# Altium PCB QSTL_M12C_BNC_v2.PcbDoc
Units mm, origin at the board's own origin, x right, y up, seen from the top; angles counter-clockwise.
Board outline 130 x 70 mm, 4 copper layers (Top Layer, Layer 1, Layer 2, Bottom Layer), stack 0.603 mm thick; 25 components, 25 nets, 132 pads, 2468 vias.
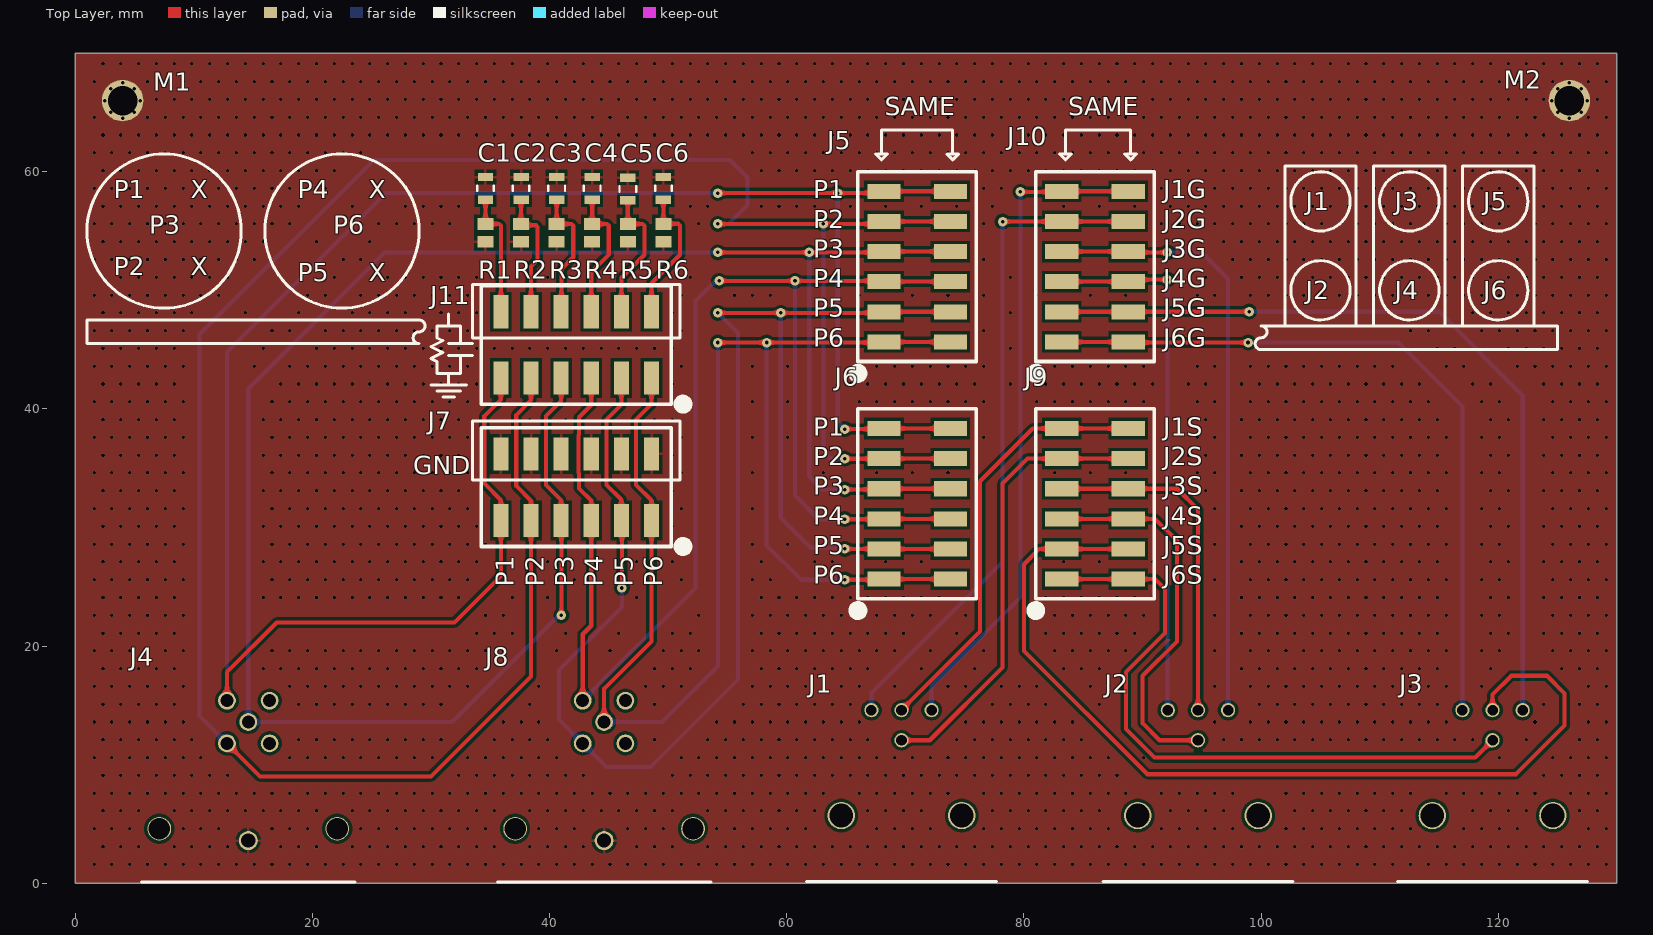
[diagram p0: Top Layer view]
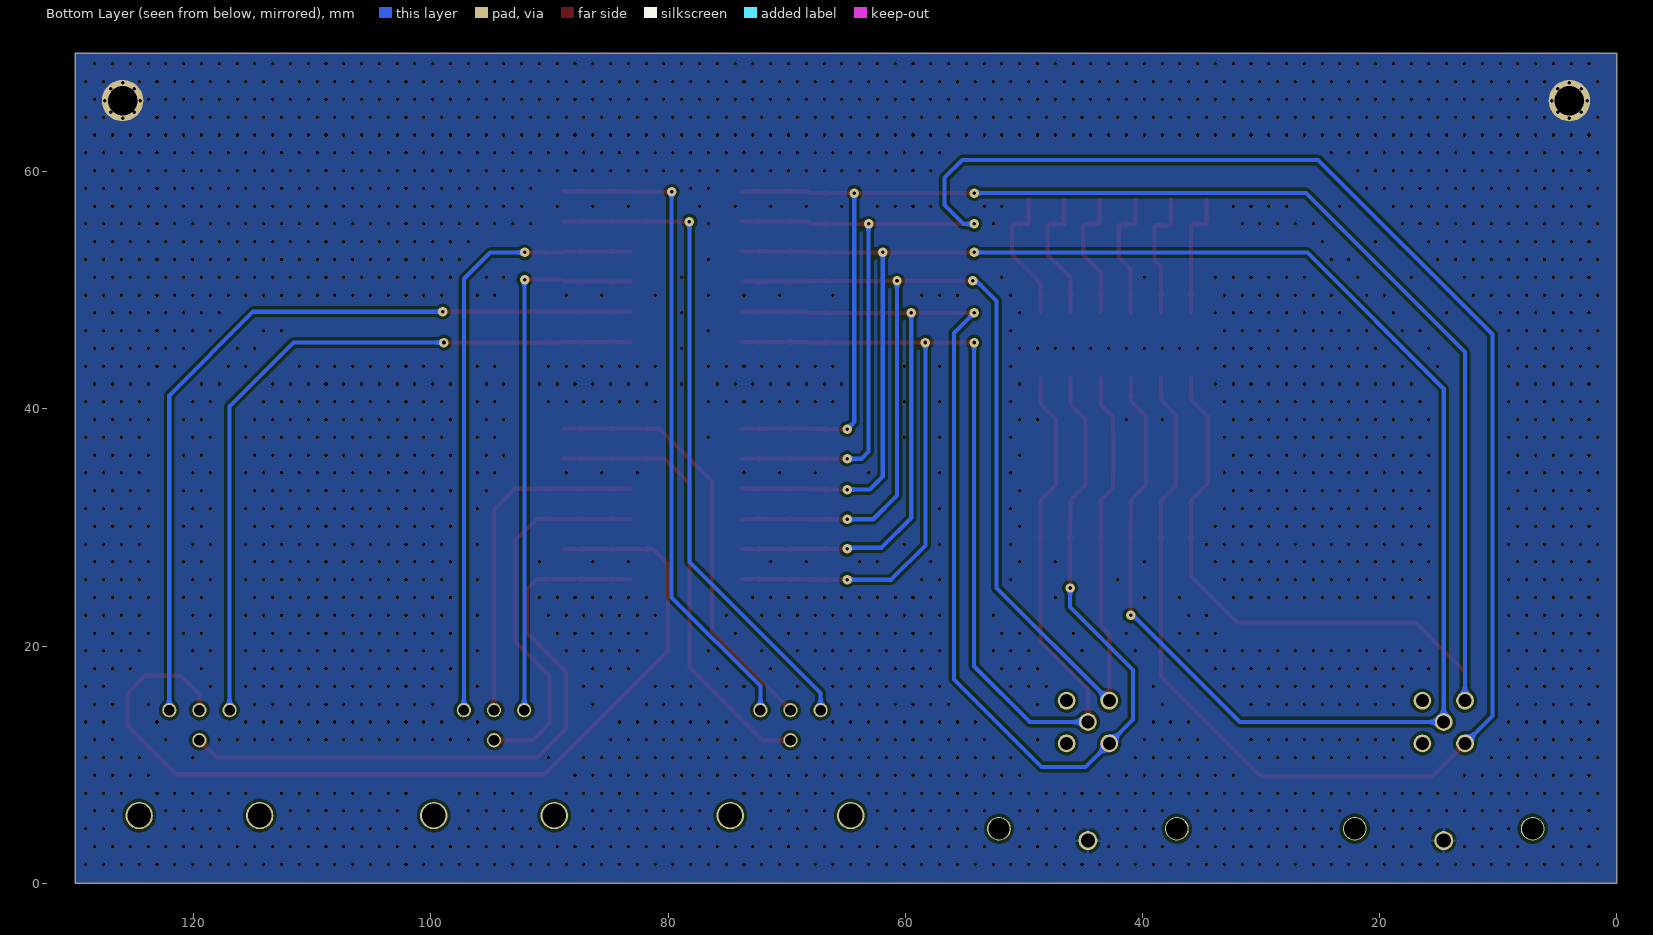
[diagram p1: Bottom Layer view, seen from below]
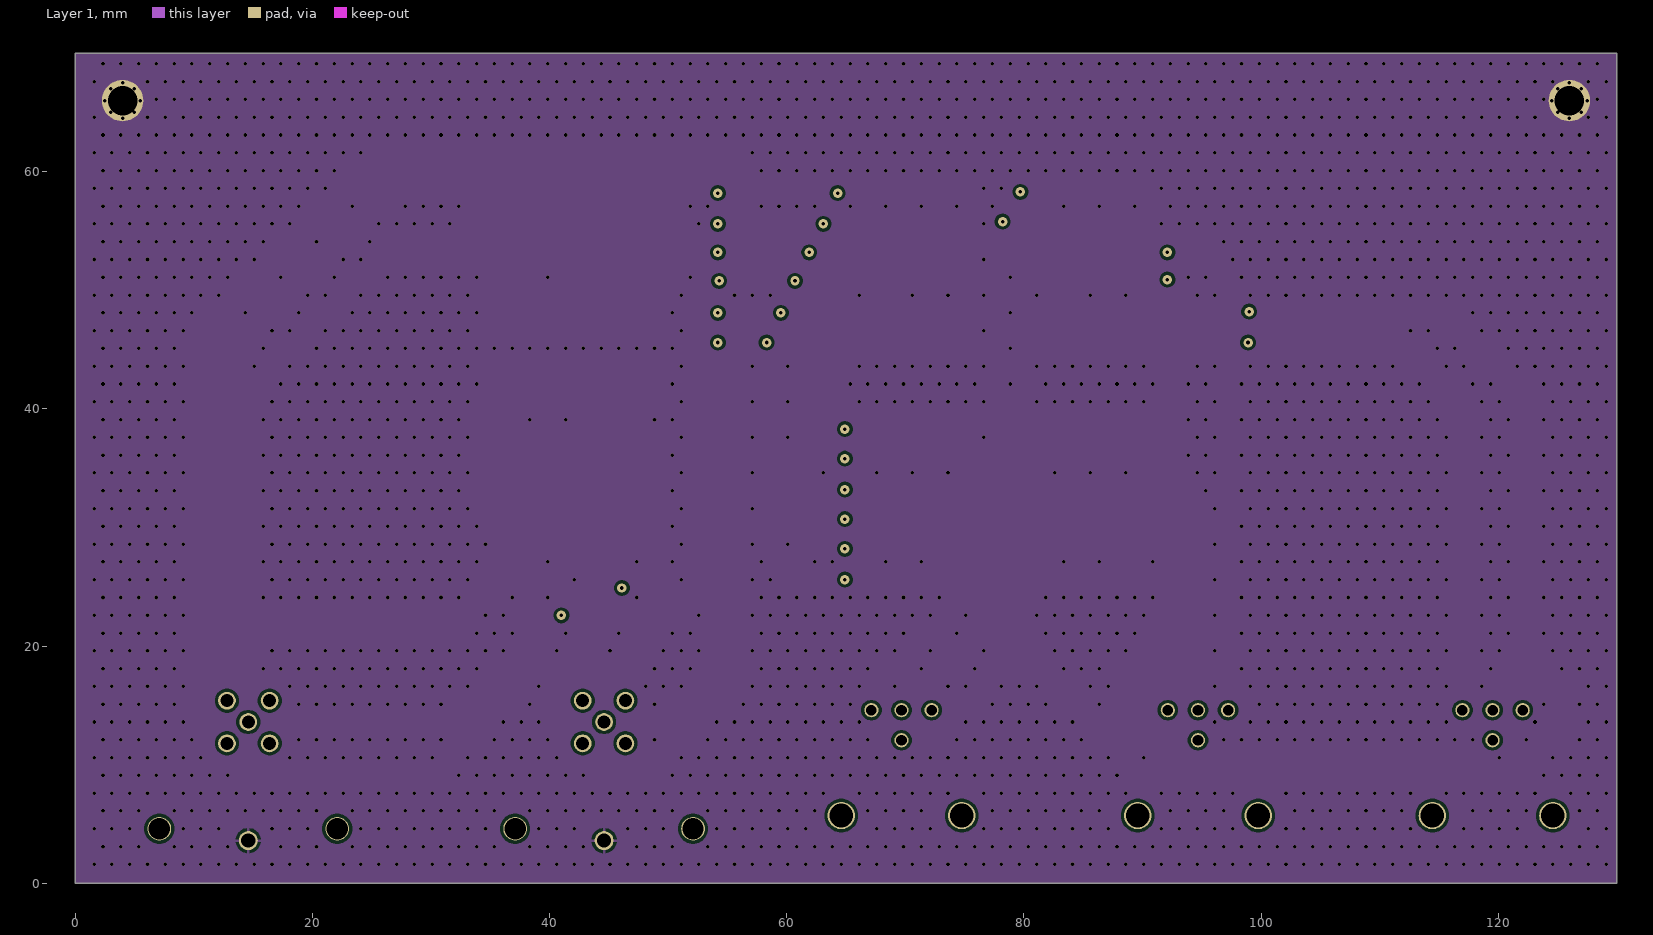
[diagram p2: Layer 1]
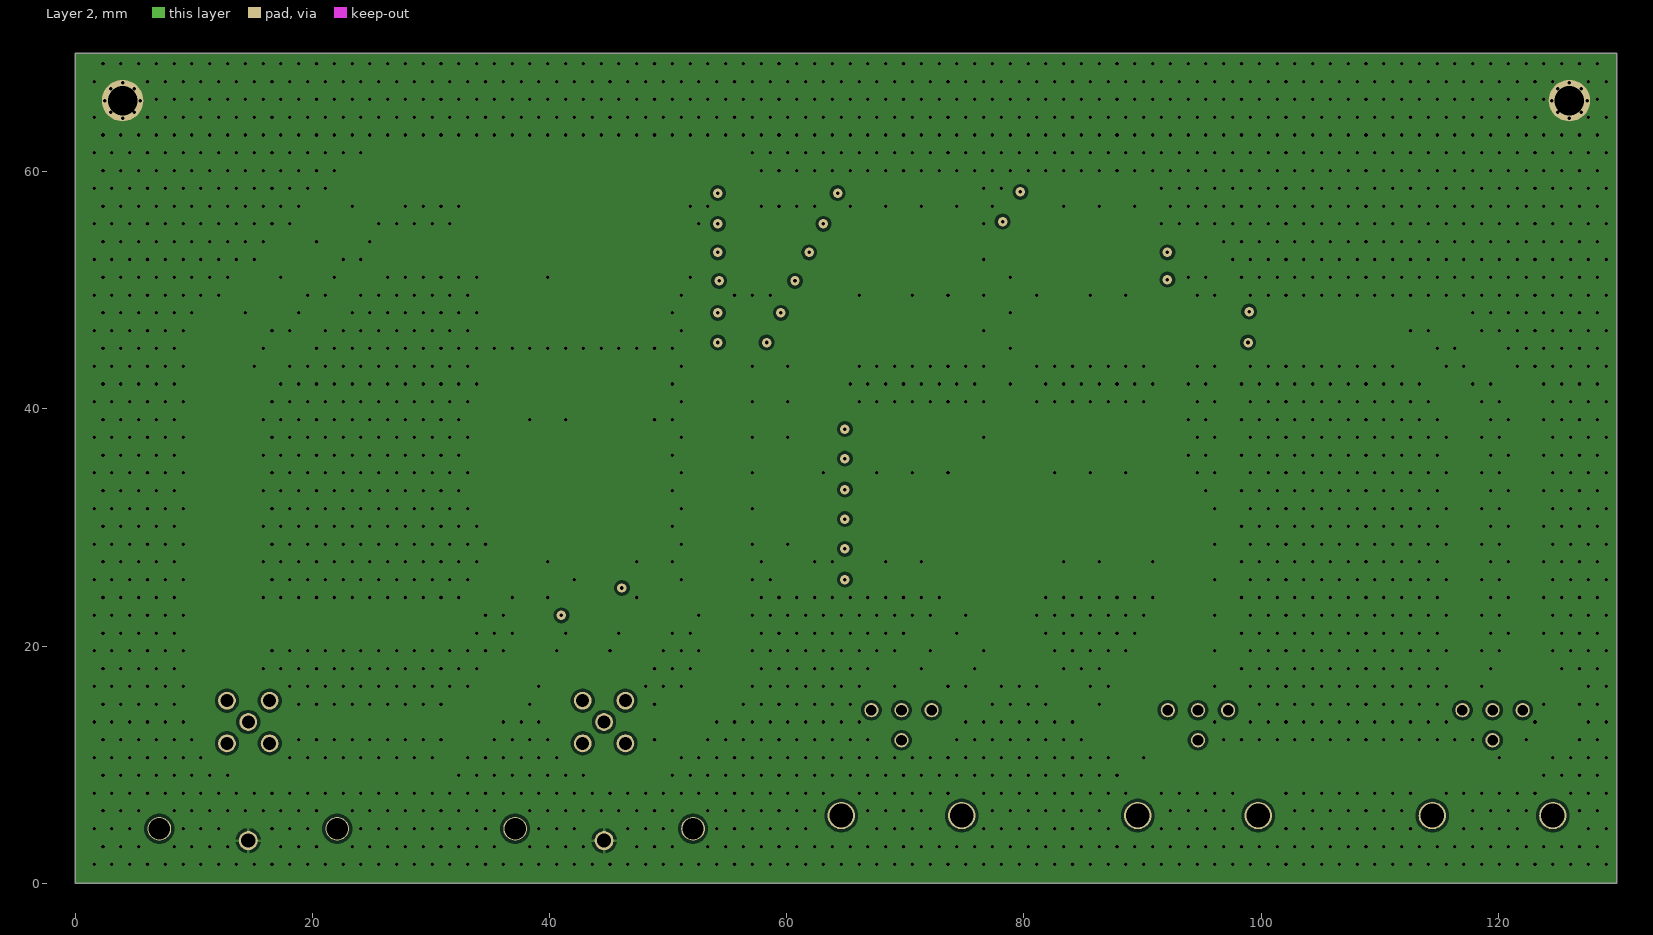
[diagram p3: Layer 2]
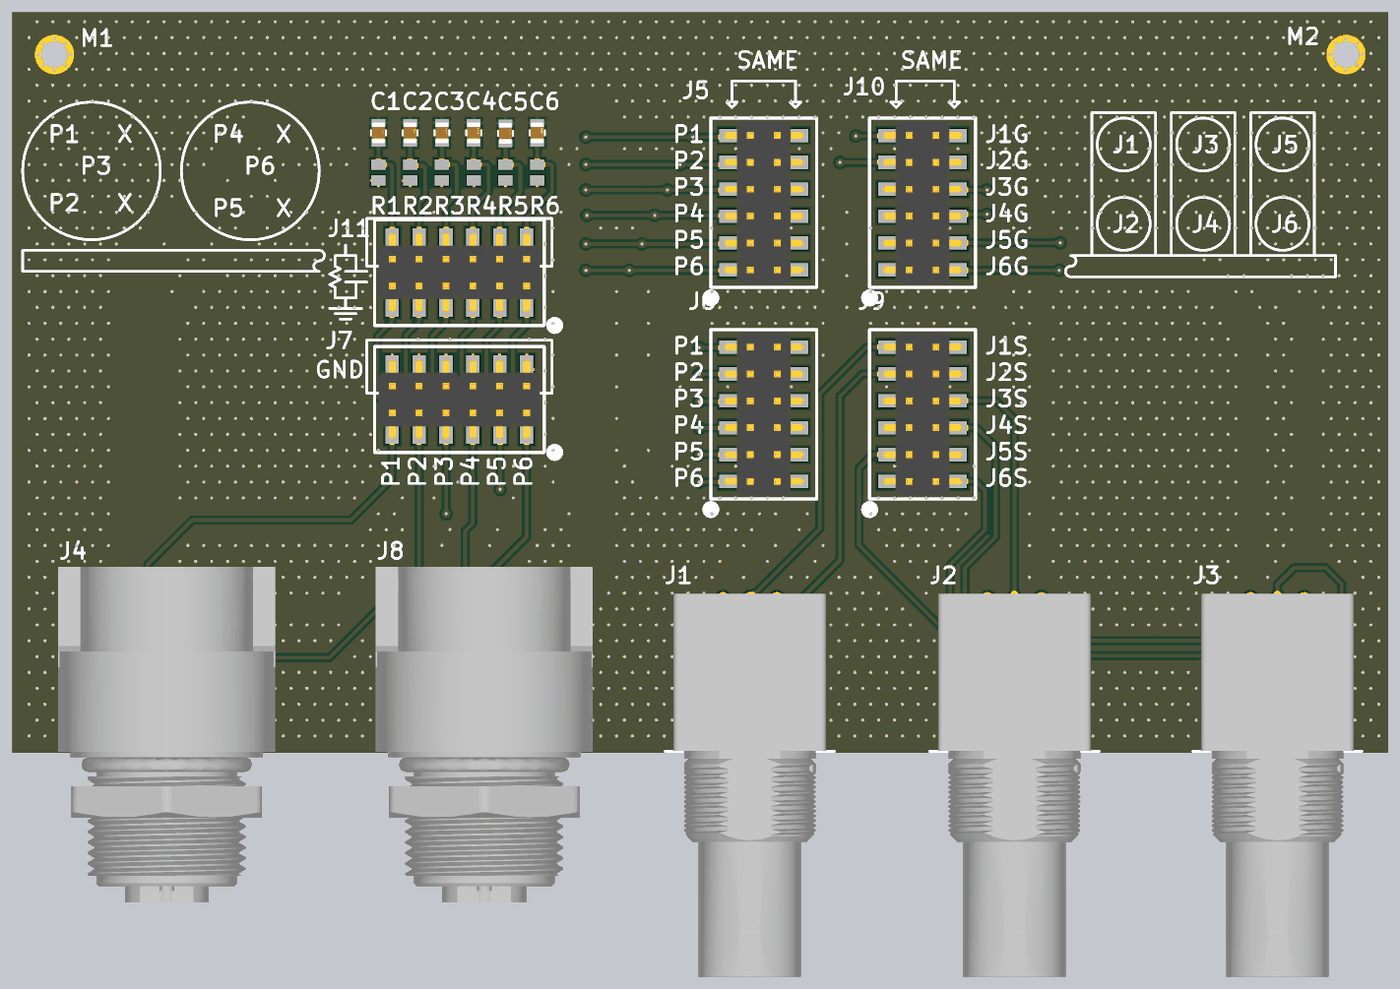
[diagram p4: 3D render of the assembled board from above, using the file's embedded part models]

## Layer stack, top to bottom
Top Solder: solder mask 0.0102, Solder Resist, Dk 3.5
Top Layer: signal copper 0.0356
Dielectric 2: prepreg 0.0711, PP-006, Dk 4.1
Layer 1: signal copper 0.035
Dielectric 1: dielectric 0.32, FR-4, Dk 4.8
Layer 2: signal copper 0.035
Dielectric 3: prepreg 0.0711, PP-006, Dk 4.1
Bottom Layer: signal copper 0.0356
Bottom Solder: solder mask 0.0102, Solder Resist, Dk 3.5

## Board outline
0,0 0,70 130,70 130,0

## Design rules (kind name [scope] priority, off if disabled: settings)
Clearance [All] p1: gap=0.254 ignorepadtopadclearanceinfootprint=FALSE
Height [All] p1: minheight=0 maxheight=200 prefheight=0
PolygonConnect [All] p1: connectstyle=Relief reliefconductorwidth=0.254 reliefentries=4 polygonreliefangle="90 Angle" airgapwidth=0.254
RoutingVias [All] p1: holewidth=0.3 width=0.8 viastyle="Through Hole" minholewidth=0.3 minwidth=0.3 maxholewidth=0.711 maxwidth=1.27
SolderMaskExpansion [All] p1: expansion=0.102 istentingtop=FALSE
SupplyNets "Schematic Supply Nets" [InNet('Earth')] p1: voltage=0.000
Width [All] p1: maxlimit=0.35 minlimit=0.254 preferedwidth=0.349 minimp=50.000000 maximp=50.000000 favimp=50.000000
29 further rules are at their usual default settings.

## Components (designator, comment, footprint, x,y, rotation, side; value= is the part's Value field where it differs from the comment)
C1 "Murata 0805" FP-GRM21B-0_15-MFG 34.6,58.6 r90 top
C2 "Murata 0805" FP-GRM21B-0_15-MFG 37.6,58.6 r90 top
C3 "Murata 0805" FP-GRM21B-0_15-MFG 40.6,58.6 r90 top
C4 "Murata 0805" FP-GRM21B-0_15-MFG 43.6,58.6 r90 top
C5 "Murata 0805" FP-GRM21B-0_15-MFG 46.6,58.55 r90 top
C6 "Murata 0805" FP-GRM21B-0_15-MFG 49.6,58.6 r90 top
J1 "Isolated Stacked BNC" 031-6575 69.68,14.6 r0 top
J2 "Isolated Stacked BNC" 031-6575 94.68,14.6 r0 top
J3 "Isolated Stacked BNC" 031-6575 119.52,14.6 r0 top
J4 "M12 5P Connector" 861-B05-213R004 14.6,13.6 r0 top
J5 "12 Pin Header" PZ254-2-06-S 71,52 r90 top
J6 "12 Pin Header" PZ254-2-06-S 71,32 r90 top
J7 "12 Pin Header" PZ254-2-06-S 42.25,33.4 r180 top
J8 "M12 5P Connector" 861-B05-213R004 44.6,13.6 r0 top
J9 "12 Pin Header" PZ254-2-06-S 86,32 r90 top
J10 "12 Pin Header" PZ254-2-06-S 86,52 r90 top
J11 "12 Pin Header" PZ254-2-06-S 42.25,45.4 r180 top
M1 "M2 Hole" M2_Hole 4,66 r0 top locked
M2 "M2 Hole" M2_Hole 126,66 r0 top locked
R1 "Panasonic 0805" RESC2013X60X40LL20T25 34.6,54.85 r270 top
R2 "Panasonic 0805" RESC2013X60X40LL20T25 37.6,54.85 r270 top
R3 "Panasonic 0805" RESC2013X60X40LL20T25 40.6,54.85 r270 top
R4 "Panasonic 0805" RESC2013X60X40LL20T25 43.6,54.85 r270 top
R5 "Panasonic 0805" RESC2013X60X40LL20T25 46.6,54.85 r270 top
R6 "Panasonic 0805" RESC2013X60X40LL20T25 49.6,54.85 r270 top

## Footprints (in the part's own frame and the unit in brackets; to place one, negate y for a bottom-side part, rotate by r counter-clockwise, add the part's x,y. Pads: shape width x height; smd on the part's side, far side on the other; paste and mask are expansions set on the pad)
031-6575 [mm] "https://www.digikey.ca/en/products/detail/amphenol-rf/031-6590/4037245"
  round 1.2 hole 0.89: BOT(0,-2.54) GND_B(-2.54,0) GND_T(2.54,0) TOP(0,0)
  round 2.3 hole 2.01: MH1(-5.08,-8.89) MH2(5.08,-8.89)
  silkscreen extent -8,-14.45 8,-14.45, body extent -7.2,-35.76 7.2,0.44, height 29.44
861-B05-213R004 [mm] "https://www.digikey.ca/en/products/detail/norcomp-inc/861-B05-213R004/22611951?s=N4IgTCBcDaIBwDYCMBaAQgBgKwrEgzAEoYYAsIAugL5App"
  round 1.5 hole 1.1: 1(-1.8,1.8) 2(1.8,1.8) 3(1.8,-1.8) 4(-1.8,-1.8) 5(0,0)
  round 2 hole 1.8: MH1(7.5,-9) MH2(-7.5,-9)
  round 1.6 hole 1.2: SH(0,-10)
  silkscreen extent -9,-13.5 9,-13.5, body extent -10.25,-27.75 10.25,4, height 20.5
FP-GRM21B-0_15-MFG [mm]
  rect 0.7x1.3 smd paste+0 mask+0: 1(-0.95,0) 2(0.95,0)
  silkscreen extent -0.22,-0.7 0.23,0.7, body extent -1.4,-0.8 1.4,0.8, height 0.25
M2_Hole [mm] "M2 Hole"
  round 3.5 hole 2.5: M2(0,0)
PZ254-2-06-S [mm] "https://jlcpcb.com/partdetail/HCTL-PZ254_2_06S/C3294464"
  rect 1.27x2.8 smd: 1(-6.35,2.8) 2(-3.81,2.8) 3(-1.27,2.8) 4(1.27,2.8) 5(3.81,2.8) 6(6.35,2.8) 7(-6.35,-2.8) 8(-3.81,-2.8) 9(-1.27,-2.8) 10(1.27,-2.8) 11(3.81,-2.8) 12(6.35,-2.8)
  silkscreen extent -9.4,-5 8,5.4, body extent -7.62,-3.75 7.62,3.75, height 9.57
RESC2013X60X40LL20T25 [mm] "Chip Resistor, 2-Leads, Body 2.00x1.25mm, IPC High Density"
  rect 1x1.35 smd: 1(-0.75,0) 2(0.75,0)
  body extent -1.1,-0.72 1.1,0.72, height 0.6

## Part data
C1 C2 C3 C4 C5 C6: library part CMP-2000-07555-2, "Chip Multilayer Ceramic Capacitors for General Purpose, 0805, 10uF, X7R, 15%, 10%, 10V", Capacitance=10uF, Case Code (Imperial)=0805, Case Code (Metric)=2012, Dielectric=X7R, Max Operating Temperature=125°C, Min Operating Temperature=-55°C, Package Quantity=3000, Tolerance=10%, Voltage Rating=10V, Case/Package=0805, Depth=1.25mm, Height=1.25mm, Length=2mm, Mount="Surface Mount", Packaging="Tape and Reel", REACH SVHC="No SVHC", Termination=SMD/SMT, Thickness=0.055inch, Voltage Rating (DC)=10V, Weight=0.000335oz, Width=1.25mm
J1 J2 J3: library part 031-6575, "https://www.digikey.ca/en/products/detail/amphenol-rf/031-6575/4037241"
J4 J8: library part 861-B05-213R004, "https://www.digikey.ca/en/products/detail/norcomp-inc/861-B05-213R004/22611951?s=N4IgTCBcDaIBwDYCMBaAQgBgKwrEgzAEoYYAsIAugL5A"
J5 J6 J7 J9 J10 J11: library part PZ254-2-06-S, "https://jlcpcb.com/partdetail/HCTL-PZ254_2_06S/C3294464"
M1 M2: library part M2_Hole
R1 R2 R3 R4 R5 R6: library part CMP-2001-00613-1, Manufacturer=Panasonic, Part Number=ERA6AEB222V

## Via types
v1: diameter 0.3, hole 0.3, Top Layer to Bottom Layer, tented both sides, 2442 vias
v2: diameter 0.8, hole 0.3, Top Layer to Bottom Layer, tented both sides, 26 vias

## Nets (pads, with @x,y where several pads share a name; then routed paths per layer and width w, separated by ;. In a path a pad name is that pad's centre, name@x,y a point inside that pad or via, vN(x,y) a via of type N, cw(c..) or ccw(c..) an arc to the next point about the centre after c; other vN are vias at no path point)
BC1: C1.1 J11.12 R1.1 | length 10.7
  Top Layer w0.349: C1.1 R1.1 35.751,55.6 35.9,55.451 J11.12
BC2: C2.1 J11.11 R2.1 | length 10.9
  Top Layer w0.349: C2.1 R2.1 37.707,55.493 38.851,55.493 39,55.344 39,52.567 38.44,52.007 J11.11
BC3: C3.1 J11.10 R3.1 | length 11.2
  Top Layer w0.349: C3.1 40.6,55.724 R3.1 41.851,55.6 42,55.451 42,52.787 41,51.787 41,48.22 J11.10
BC4: C4.1 J11.9 R4.1 | length 11.4
  Top Layer w0.349: J11.9 43.52,51.547 45,53.027 45,55.451 44.851,55.6 R4.1 C4.1
BC5: C5.1 J11.8 R5.1 | length 11.5
  Top Layer w0.349: J11.8 46.06,51.06 48,53 48,55.451 47.851,55.6 R5.1 46.6,55.724 C5.1
BC6: C6.1 J11.7 R6.1 | length 11.8
  Top Layer w0.349: J11.7 48.6,50.6 51,53 51,55.465 50.851,55.614 R6.1@49.614,55.614 ; R6.1 C6.1
Earth: C1.2 C2.2 C3.2 C4.2 C5.2 C6.2 J4.SH J7.7 J7.8 J7.9 J7.10 J7.11 J7.12 J8.SH M1.M2 M2.M2 R1.2 R2.2 R3.2 R4.2 R5.2 R6.2
  other v1: 1.6,1.6 3.1,1.6 4.6,1.6 6.1,1.6 7.6,1.6 9.1,1.6 10.6,1.6 12.1,1.6 13.6,1.6 15.1,1.6 16.6,1.6 18.1,1.6 19.6,1.6 21.1,1.6 22.6,1.6 24.1,1.6 25.6,1.6 27.1,1.6 28.6,1.6 30.1,1.6 31.6,1.6 33.1,1.6 34.6,1.6 36.1,1.6 37.6,1.6 39.1,1.6 40.6,1.6 42.1,1.6 43.6,1.6 45.1,1.6 46.6,1.6 48.1,1.6 49.6,1.6 51.1,1.6 52.6,1.6 54.1,1.6 55.6,1.6 57.1,1.6 58.6,1.6 60.1,1.6 61.6,1.6 63.1,1.6 64.6,1.6 66.1,1.6 67.6,1.6 69.1,1.6 70.6,1.6 72.1,1.6 73.6,1.6 75.1,1.6 76.6,1.6 78.1,1.6 79.6,1.6 81.1,1.6 82.6,1.6 84.1,1.6 85.6,1.6 87.1,1.6 88.6,1.6 90.1,1.6 91.6,1.6 93.1,1.6 94.6,1.6 96.1,1.6 97.6,1.6 99.1,1.6 100.6,1.6 102.1,1.6 103.6,1.6 105.1,1.6 106.6,1.6 108.1,1.6 109.6,1.6 111.1,1.6 112.6,1.6 114.1,1.6 115.6,1.6 117.1,1.6 118.6,1.6 120.1,1.6 121.6,1.6 123.1,1.6 124.6,1.6 126.1,1.6 127.6,1.6 129.1,1.6 2.35,3.1 3.85,3.1 5.35,3.1 8.35,3.1 9.85,3.1 11.35,3.1 12.85,3.1 17.35,3.1 18.85,3.1 20.35,3.1 23.35,3.1 24.85,3.1 26.35,3.1 27.85,3.1 29.35,3.1 30.85,3.1 32.35,3.1 33.85,3.1 35.35,3.1 38.35,3.1 39.85,3.1 41.35,3.1 42.85,3.1 47.35,3.1 48.85,3.1 50.35,3.1 53.35,3.1 54.85,3.1 56.35,3.1 57.85,3.1 59.35,3.1 60.85,3.1 62.35,3.1 63.85,3.1 65.35,3.1 66.85,3.1 68.35,3.1 69.85,3.1 71.35,3.1 72.85,3.1 74.35,3.1 75.85,3.1 77.35,3.1 78.85,3.1 80.35,3.1 81.85,3.1 83.35,3.1 84.85,3.1 86.35,3.1 87.85,3.1 89.35,3.1 90.85,3.1 92.35,3.1 93.85,3.1 95.35,3.1 96.85,3.1 98.35,3.1 99.85,3.1 101.35,3.1 102.85,3.1 104.35,3.1 105.85,3.1 107.35,3.1 108.85,3.1 110.35,3.1 111.85,3.1 113.35,3.1 114.85,3.1 116.35,3.1 117.85,3.1 119.35,3.1 120.85,3.1 122.35,3.1 123.85,3.1 125.35,3.1 126.85,3.1 128.35,3.1 1.6,4.6 3.1,4.6 4.6,4.6 9.1,4.6 10.6,4.6 12.1,4.6 16.6,4.6 18.1,4.6 19.6,4.6 24.1,4.6 25.6,4.6 27.1,4.6 28.6,4.6 30.1,4.6 31.6,4.6 33.1,4.6 34.6,4.6 39.1,4.6 40.6,4.6 42.1,4.6 46.6,4.6 48.1,4.6 49.6,4.6 54.1,4.6 55.6,4.6 57.1,4.6 58.6,4.6 60.1,4.6 61.6,4.6 67.6,4.6 69.1,4.6 70.6,4.6 72.1,4.6 76.6,4.6 78.1,4.6 79.6,4.6 81.1,4.6 82.6,4.6 84.1,4.6 85.6,4.6 87.1,4.6 91.6,4.6 93.1,4.6 94.6,4.6 96.1,4.6 97.6,4.6 102.1,4.6 103.6,4.6 105.1,4.6 106.6,4.6 108.1,4.6 109.6,4.6 111.1,4.6 112.6,4.6 117.1,4.6 118.6,4.6 120.1,4.6 121.6,4.6 127.6,4.6 129.1,4.6 2.35,6.1 3.85,6.1 5.35,6.1 8.35,6.1 9.85,6.1 11.35,6.1 12.85,6.1 14.35,6.1 15.85,6.1 17.35,6.1 18.85,6.1 20.35,6.1 23.35,6.1 24.85,6.1 26.35,6.1 27.85,6.1 29.35,6.1 30.85,6.1 32.35,6.1 33.85,6.1 35.35,6.1 38.35,6.1 39.85,6.1 41.35,6.1 42.85,6.1 44.35,6.1 45.85,6.1 47.35,6.1 48.85,6.1 50.35,6.1 53.35,6.1 54.85,6.1 56.35,6.1 57.85,6.1 59.35,6.1 60.85,6.1 62.35,6.1 66.85,6.1 68.35,6.1 69.85,6.1 71.35,6.1 77.35,6.1 78.85,6.1 80.35,6.1 81.85,6.1 83.35,6.1 84.85,6.1 86.35,6.1 92.35,6.1 93.85,6.1 95.35,6.1 96.85,6.1 102.85,6.1 104.35,6.1 105.85,6.1 107.35,6.1 108.85,6.1 110.35,6.1 111.85,6.1 117.85,6.1 119.35,6.1 120.85,6.1 122.35,6.1 126.85,6.1 128.35,6.1 1.6,7.6 3.1,7.6 4.6,7.6 6.1,7.6 7.6,7.6 9.1,7.6 10.6,7.6 12.1,7.6 13.6,7.6 15.1,7.6 16.6,7.6 18.1,7.6 19.6,7.6 21.1,7.6 22.6,7.6 24.1,7.6 25.6,7.6 27.1,7.6 28.6,7.6 30.1,7.6 31.6,7.6 33.1,7.6 34.6,7.6 36.1,7.6 37.6,7.6 39.1,7.6 40.6,7.6 42.1,7.6 43.6,7.6 45.1,7.6 46.6,7.6 48.1,7.6 49.6,7.6 51.1,7.6 52.6,7.6 54.1,7.6 55.6,7.6 57.1,7.6 58.6,7.6 60.1,7.6 61.6,7.6 63.1,7.6 66.1,7.6 67.6,7.6 69.1,7.6 70.6,7.6 72.1,7.6 73.6,7.6 76.6,7.6 78.1,7.6 79.6,7.6 81.1,7.6 82.6,7.6 84.1,7.6 85.6,7.6 87.1,7.6 88.6,7.6 91.6,7.6 93.1,7.6 94.6,7.6 96.1,7.6 97.6,7.6 102.1,7.6 103.6,7.6 105.1,7.6 106.6,7.6 108.1,7.6 109.6,7.6 111.1,7.6 112.6,7.6 115.6,7.6 117.1,7.6 118.6,7.6 120.1,7.6 121.6,7.6 123.1,7.6 126.1,7.6 127.6,7.6 129.1,7.6 2.35,9.1 3.85,9.1 5.35,9.1 6.85,9.1 8.35,9.1 9.85,9.1 11.35,9.1 12.85,9.1 32.35,9.1 33.85,9.1 35.35,9.1 36.85,9.1 38.35,9.1 39.85,9.1 41.35,9.1 42.85,9.1 50.35,9.1 51.85,9.1 53.35,9.1 54.85,9.1 56.35,9.1 57.85,9.1 59.35,9.1 60.85,9.1 62.35,9.1 63.85,9.1 65.35,9.1 66.85,9.1 68.35,9.1 69.85,9.1 71.35,9.1 72.85,9.1 74.35,9.1 75.85,9.1 77.35,9.1 78.85,9.1 80.35,9.1 81.85,9.1 83.35,9.1 84.85,9.1 86.35,9.1 87.85,9.1 123.85,9.1 125.35,9.1 126.85,9.1 128.35,9.1 1.6,10.6 3.1,10.6 4.6,10.6 6.1,10.6 7.6,10.6 9.1,10.6 10.6,10.6 18.1,10.6 19.6,10.6 21.1,10.6 22.6,10.6 24.1,10.6 25.6,10.6 27.1,10.6 28.6,10.6 30.1,10.6 33.1,10.6 34.6,10.6 36.1,10.6 37.6,10.6 39.1,10.6 40.6,10.6 51.1,10.6 52.6,10.6 54.1,10.6 55.6,10.6 57.1,10.6 58.6,10.6 60.1,10.6 61.6,10.6 63.1,10.6 64.6,10.6 66.1,10.6 67.6,10.6 69.1,10.6 70.6,10.6 72.1,10.6 73.6,10.6 75.1,10.6 76.6,10.6 78.1,10.6 79.6,10.6 81.1,10.6 82.6,10.6 84.1,10.6 85.6,10.6 87.1,10.6 90.1,10.6 120.1,10.6 124.6,10.6 126.1,10.6 127.6,10.6 129.1,10.6 2.35,12.1 3.85,12.1 5.35,12.1 6.85,12.1 8.35,12.1 9.85,12.1 18.85,12.1 20.35,12.1 21.85,12.1 23.35,12.1 24.85,12.1 26.35,12.1 27.85,12.1 29.35,12.1 30.85,12.1 35.35,12.1 36.85,12.1 38.35,12.1 39.85,12.1 48.85,12.1 53.35,12.1 54.85,12.1 56.35,12.1 57.85,12.1 59.35,12.1 60.85,12.1 62.35,12.1 63.85,12.1 65.35,12.1 66.85,12.1 74.35,12.1 75.85,12.1 77.35,12.1 78.85,12.1 80.35,12.1 81.85,12.1 83.35,12.1 84.85,12.1 96.85,12.1 98.35,12.1 99.85,12.1 101.35,12.1 102.85,12.1 104.35,12.1 105.85,12.1 107.35,12.1 108.85,12.1 110.35,12.1 111.85,12.1 113.35,12.1 114.85,12.1 116.35,12.1 117.85,12.1 122.35,12.1 126.85,12.1 128.35,12.1 1.6,13.6 3.1,13.6 4.6,13.6 6.1,13.6 7.6,13.6 9.1,13.6 36.1,13.6 37.6,13.6 39.1,13.6 54.1,13.6 55.6,13.6 57.1,13.6 58.6,13.6 60.1,13.6 61.6,13.6 63.1,13.6 64.6,13.6 66.1,13.6 75.1,13.6 76.6,13.6 78.1,13.6 79.6,13.6 81.1,13.6 82.6,13.6 84.1,13.6 96.1,13.6 99.1,13.6 100.6,13.6 102.1,13.6 103.6,13.6 105.1,13.6 106.6,13.6 108.1,13.6 109.6,13.6 111.1,13.6 112.6,13.6 114.1,13.6 115.6,13.6 123.1,13.6 127.6,13.6 129.1,13.6 2.35,15.1 3.85,15.1 5.35,15.1 6.85,15.1 8.35,15.1 18.85,15.1 20.35,15.1 21.85,15.1 23.35,15.1 24.85,15.1 26.35,15.1 27.85,15.1 29.35,15.1 30.85,15.1 38.35,15.1 48.85,15.1 56.35,15.1 57.85,15.1 59.35,15.1 60.85,15.1 62.35,15.1 63.85,15.1 65.35,15.1 77.35,15.1 78.85,15.1 80.35,15.1 81.85,15.1 86.35,15.1 99.85,15.1 101.35,15.1 102.85,15.1 104.35,15.1 105.85,15.1 107.35,15.1 108.85,15.1 110.35,15.1 111.85,15.1 113.35,15.1 114.85,15.1 123.85,15.1 126.85,15.1 128.35,15.1 1.6,16.6 3.1,16.6 4.6,16.6 6.1,16.6 7.6,16.6 9.1,16.6 18.1,16.6 19.6,16.6 21.1,16.6 22.6,16.6 24.1,16.6 25.6,16.6 27.1,16.6 28.6,16.6 30.1,16.6 31.6,16.6 33.1,16.6 39.1,16.6 48.1,16.6 49.6,16.6 51.1,16.6 57.1,16.6 58.6,16.6 60.1,16.6 61.6,16.6 63.1,16.6 64.6,16.6 66.1,16.6 69.1,16.6 73.6,16.6 75.1,16.6 78.1,16.6 79.6,16.6 81.1,16.6 85.6,16.6 87.1,16.6 96.1,16.6 99.1,16.6 100.6,16.6 102.1,16.6 103.6,16.6 105.1,16.6 106.6,16.6 108.1,16.6 109.6,16.6 111.1,16.6 112.6,16.6 114.1,16.6 115.6,16.6 118.6,16.6 127.6,16.6 129.1,16.6 2.35,18.1 3.85,18.1 5.35,18.1 6.85,18.1 8.35,18.1 15.85,18.1 17.35,18.1 18.85,18.1 20.35,18.1 21.85,18.1 23.35,18.1 24.85,18.1 26.35,18.1 27.85,18.1 29.35,18.1 30.85,18.1 32.35,18.1 33.85,18.1 48.85,18.1 50.35,18.1 51.85,18.1 57.85,18.1 59.35,18.1 60.85,18.1 62.35,18.1 63.85,18.1 65.35,18.1 66.85,18.1 71.35,18.1 75.85,18.1 83.35,18.1 84.85,18.1 86.35,18.1 98.35,18.1 99.85,18.1 101.35,18.1 102.85,18.1 104.35,18.1 105.85,18.1 107.35,18.1 108.85,18.1 110.35,18.1 111.85,18.1 113.35,18.1 114.85,18.1 119.35,18.1 125.35,18.1 126.85,18.1 128.35,18.1 1.6,19.6 3.1,19.6 4.6,19.6 6.1,19.6 7.6,19.6 9.1,19.6 16.6,19.6 18.1,19.6 19.6,19.6 21.1,19.6 22.6,19.6 24.1,19.6 25.6,19.6 27.1,19.6 28.6,19.6 30.1,19.6 31.6,19.6 33.1,19.6 34.6,19.6 36.1,19.6 40.6,19.6 45.1,19.6 49.6,19.6 51.1,19.6 52.6,19.6 57.1,19.6 58.6,19.6 60.1,19.6 61.6,19.6 63.1,19.6 64.6,19.6 66.1,19.6 67.6,19.6 69.1,19.6 72.1,19.6 76.6,19.6 82.6,19.6 84.1,19.6 85.6,19.6 87.1,19.6 88.6,19.6 96.1,19.6 99.1,19.6 100.6,19.6 102.1,19.6 103.6,19.6 105.1,19.6 106.6,19.6 108.1,19.6 109.6,19.6 111.1,19.6 112.6,19.6 114.1,19.6 115.6,19.6 118.6,19.6 120.1,19.6 124.6,19.6 126.1,19.6 127.6,19.6 129.1,19.6 2.35,21.1 3.85,21.1 5.35,21.1 6.85,21.1 8.35,21.1 33.85,21.1 35.35,21.1 36.85,21.1 41.35,21.1 45.85,21.1 50.35,21.1 51.85,21.1 57.85,21.1 59.35,21.1 60.85,21.1 62.35,21.1 63.85,21.1 65.35,21.1 66.85,21.1 68.35,21.1 69.85,21.1 74.35,21.1 81.85,21.1 83.35,21.1 84.85,21.1 86.35,21.1 87.85,21.1 89.35,21.1 98.35,21.1 99.85,21.1 101.35,21.1 102.85,21.1 104.35,21.1 105.85,21.1 107.35,21.1 108.85,21.1 110.35,21.1 111.85,21.1 113.35,21.1 114.85,21.1 119.35,21.1 120.85,21.1 123.85,21.1 125.35,21.1 126.85,21.1 128.35,21.1 1.6,22.6 3.1,22.6 4.6,22.6 6.1,22.6 7.6,22.6 9.1,22.6 34.6,22.6 36.1,22.6 52.6,22.6 57.1,22.6 58.6,22.6 60.1,22.6 61.6,22.6 63.1,22.6 64.6,22.6 66.1,22.6 67.6,22.6 69.1,22.6 70.6,22.6 72.1,22.6 75.1,22.6 81.1,22.6 82.6,22.6 84.1,22.6 85.6,22.6 87.1,22.6 88.6,22.6 90.1,22.6 96.1,22.6 99.1,22.6 100.6,22.6 102.1,22.6 103.6,22.6 105.1,22.6 106.6,22.6 108.1,22.6 109.6,22.6 111.1,22.6 112.6,22.6 114.1,22.6 115.6,22.6 118.6,22.6 120.1,22.6 124.6,22.6 126.1,22.6 127.6,22.6 129.1,22.6 2.35,24.1 3.85,24.1 5.35,24.1 6.85,24.1 8.35,24.1 15.85,24.1 17.35,24.1 18.85,24.1 20.35,24.1 21.85,24.1 23.35,24.1 24.85,24.1 26.35,24.1 27.85,24.1 29.35,24.1 30.85,24.1 32.35,24.1 36.85,24.1 39.85,24.1 47.35,24.1 57.85,24.1 59.35,24.1 60.85,24.1 62.35,24.1 63.85,24.1 65.35,24.1 66.85,24.1 68.35,24.1 69.85,24.1 71.35,24.1 72.85,24.1 81.85,24.1 83.35,24.1 84.85,24.1 86.35,24.1 87.85,24.1 89.35,24.1 90.85,24.1 98.35,24.1 99.85,24.1 101.35,24.1 102.85,24.1 104.35,24.1 105.85,24.1 107.35,24.1 108.85,24.1 110.35,24.1 111.85,24.1 113.35,24.1 114.85,24.1 119.35,24.1 120.85,24.1 123.85,24.1 125.35,24.1 126.85,24.1 128.35,24.1 1.6,25.6 3.1,25.6 4.6,25.6 6.1,25.6 7.6,25.6 9.1,25.6 16.6,25.6 18.1,25.6 19.6,25.6 21.1,25.6 22.6,25.6 24.1,25.6 25.6,25.6 27.1,25.6 28.6,25.6 30.1,25.6 31.6,25.6 33.1,25.6 42.1,25.6 51.1,25.6 57.1,25.6 58.6,25.6 96.1,25.6 99.1,25.6 100.6,25.6 102.1,25.6 103.6,25.6 105.1,25.6 106.6,25.6 108.1,25.6 109.6,25.6 111.1,25.6 112.6,25.6 114.1,25.6 115.6,25.6 118.6,25.6 120.1,25.6 124.6,25.6 126.1,25.6 127.6,25.6 129.1,25.6 2.35,27.1 3.85,27.1 5.35,27.1 6.85,27.1 8.35,27.1 15.85,27.1 17.35,27.1 18.85,27.1 20.35,27.1 21.85,27.1 23.35,27.1 24.85,27.1 26.35,27.1 27.85,27.1 29.35,27.1 30.85,27.1 32.35,27.1 33.85,27.1 39.85,27.1 47.35,27.1 50.35,27.1 57.85,27.1 62.35,27.1 63.85,27.1 68.35,27.1 71.35,27.1 83.35,27.1 86.35,27.1 90.85,27.1 98.35,27.1 99.85,27.1 101.35,27.1 102.85,27.1 104.35,27.1 105.85,27.1 107.35,27.1 108.85,27.1 110.35,27.1 111.85,27.1 113.35,27.1 114.85,27.1 119.35,27.1 120.85,27.1 123.85,27.1 125.35,27.1 126.85,27.1 128.35,27.1 1.6,28.6 3.1,28.6 4.6,28.6 6.1,28.6 7.6,28.6 9.1,28.6 16.6,28.6 18.1,28.6 19.6,28.6 21.1,28.6 22.6,28.6 24.1,28.6 25.6,28.6 27.1,28.6 28.6,28.6 30.1,28.6 31.6,28.6 33.1,28.6 34.6,28.6 51.1,28.6 57.1,28.6 60.1,28.6 96.1,28.6 99.1,28.6 100.6,28.6 102.1,28.6 103.6,28.6 105.1,28.6 106.6,28.6 108.1,28.6 109.6,28.6 111.1,28.6 112.6,28.6 114.1,28.6 115.6,28.6 118.6,28.6 120.1,28.6 124.6,28.6 126.1,28.6 127.6,28.6 129.1,28.6 2.35,30.1 3.85,30.1 5.35,30.1 6.85,30.1 8.35,30.1 15.85,30.1 17.35,30.1 18.85,30.1 20.35,30.1 21.85,30.1 23.35,30.1 24.85,30.1 26.35,30.1 27.85,30.1 29.35,30.1 30.85,30.1 32.35,30.1 33.85,30.1 50.35,30.1 98.35,30.1 99.85,30.1 101.35,30.1 102.85,30.1 104.35,30.1 105.85,30.1 107.35,30.1 108.85,30.1 110.35,30.1 111.85,30.1 113.35,30.1 114.85,30.1 119.35,30.1 120.85,30.1 123.85,30.1 125.35,30.1 126.85,30.1 128.35,30.1 1.6,31.6 3.1,31.6 4.6,31.6 6.1,31.6 7.6,31.6 9.1,31.6 16.6,31.6 18.1,31.6 19.6,31.6 21.1,31.6 22.6,31.6 24.1,31.6 25.6,31.6 27.1,31.6 28.6,31.6 30.1,31.6 31.6,31.6 33.1,31.6 51.1,31.6 57.1,31.6 96.1,31.6 99.1,31.6 100.6,31.6 102.1,31.6 103.6,31.6 105.1,31.6 106.6,31.6 108.1,31.6 109.6,31.6 111.1,31.6 112.6,31.6 114.1,31.6 115.6,31.6 118.6,31.6 120.1,31.6 124.6,31.6 126.1,31.6 127.6,31.6 129.1,31.6 2.35,33.1 3.85,33.1 5.35,33.1 6.85,33.1 8.35,33.1 15.85,33.1 17.35,33.1 18.85,33.1 20.35,33.1 21.85,33.1 23.35,33.1 24.85,33.1 26.35,33.1 27.85,33.1 29.35,33.1 30.85,33.1 32.35,33.1 50.35,33.1 95.35,33.1 98.35,33.1 99.85,33.1 101.35,33.1 102.85,33.1 104.35,33.1 105.85,33.1 107.35,33.1 108.85,33.1 110.35,33.1 111.85,33.1 113.35,33.1 114.85,33.1 119.35,33.1 120.85,33.1 123.85,33.1 125.35,33.1 126.85,33.1 128.35,33.1 1.6,34.6 3.1,34.6 4.6,34.6 6.1,34.6 7.6,34.6 9.1,34.6 16.6,34.6 18.1,34.6 19.6,34.6 21.1,34.6 22.6,34.6 24.1,34.6 25.6,34.6 27.1,34.6 28.6,34.6 30.1,34.6 31.6,34.6 33.1,34.6 51.1,34.6 57.1,34.6 63.1,34.6 67.6,34.6 70.6,34.6 73.6,34.6 82.6,34.6 85.6,34.6 88.6,34.6 94.6,34.6 96.1,34.6 99.1,34.6 100.6,34.6 102.1,34.6 103.6,34.6 105.1,34.6 106.6,34.6 108.1,34.6 109.6,34.6 111.1,34.6 112.6,34.6 114.1,34.6 115.6,34.6 118.6,34.6 120.1,34.6 124.6,34.6 126.1,34.6 127.6,34.6 129.1,34.6 2.35,36.1 3.85,36.1 5.35,36.1 6.85,36.1 8.35,36.1 15.85,36.1 17.35,36.1 18.85,36.1 20.35,36.1 21.85,36.1 23.35,36.1 24.85,36.1 26.35,36.1 27.85,36.1 29.35,36.1 30.85,36.1 32.35,36.1 50.35,36.1 93.85,36.1 95.35,36.1 98.35,36.1 99.85,36.1 101.35,36.1 102.85,36.1 104.35,36.1 105.85,36.1 107.35,36.1 108.85,36.1 110.35,36.1 111.85,36.1 113.35,36.1 114.85,36.1 119.35,36.1 120.85,36.1 123.85,36.1 125.35,36.1 126.85,36.1 128.35,36.1 1.6,37.6 3.1,37.6 4.6,37.6 6.1,37.6 7.6,37.6 9.1,37.6 16.6,37.6 18.1,37.6 19.6,37.6 21.1,37.6 22.6,37.6 24.1,37.6 25.6,37.6 27.1,37.6 28.6,37.6 30.1,37.6 31.6,37.6 33.1,37.6 51.1,37.6 57.1,37.6 60.1,37.6 76.6,37.6 94.6,37.6 96.1,37.6 99.1,37.6 100.6,37.6 102.1,37.6 103.6,37.6 105.1,37.6 106.6,37.6 108.1,37.6 109.6,37.6 111.1,37.6 112.6,37.6 114.1,37.6 115.6,37.6 118.6,37.6 120.1,37.6 124.6,37.6 126.1,37.6 127.6,37.6 129.1,37.6 2.35,39.1 3.85,39.1 5.35,39.1 6.85,39.1 8.35,39.1 15.85,39.1 17.35,39.1 18.85,39.1 20.35,39.1 21.85,39.1 23.35,39.1 24.85,39.1 26.35,39.1 27.85,39.1 29.35,39.1 30.85,39.1 32.35,39.1 38.35,39.1 41.35,39.1 48.85,39.1 50.35,39.1 93.85,39.1 95.35,39.1 98.35,39.1 99.85,39.1 101.35,39.1 102.85,39.1 104.35,39.1 105.85,39.1 107.35,39.1 108.85,39.1 110.35,39.1 111.85,39.1 113.35,39.1 114.85,39.1 119.35,39.1 120.85,39.1 123.85,39.1 125.35,39.1 126.85,39.1 128.35,39.1 1.6,40.6 3.1,40.6 4.6,40.6 6.1,40.6 7.6,40.6 9.1,40.6 16.6,40.6 18.1,40.6 19.6,40.6 21.1,40.6 22.6,40.6 24.1,40.6 25.6,40.6 27.1,40.6 28.6,40.6 30.1,40.6 31.6,40.6 33.1,40.6 51.1,40.6 57.1,40.6 60.1,40.6 66.1,40.6 67.6,40.6 69.1,40.6 70.6,40.6 72.1,40.6 73.6,40.6 75.1,40.6 76.6,40.6 81.1,40.6 82.6,40.6 84.1,40.6 85.6,40.6 87.1,40.6 88.6,40.6 90.1,40.6 94.6,40.6 96.1,40.6 99.1,40.6 100.6,40.6 102.1,40.6 103.6,40.6 105.1,40.6 106.6,40.6 108.1,40.6 109.6,40.6 111.1,40.6 112.6,40.6 114.1,40.6 118.6,40.6 120.1,40.6 124.6,40.6 126.1,40.6 127.6,40.6 129.1,40.6 2.35,42.1 3.85,42.1 5.35,42.1 6.85,42.1 8.35,42.1 17.35,42.1 18.85,42.1 20.35,42.1 21.85,42.1 23.35,42.1 24.85,42.1 26.35,42.1 27.85,42.1 29.35,42.1 30.85,42.1 32.35,42.1 33.85,42.1 50.35,42.1 65.35,42.1 66.85,42.1 68.35,42.1 69.85,42.1 71.35,42.1 72.85,42.1 74.35,42.1 75.85,42.1 78.85,42.1 81.85,42.1 83.35,42.1 84.85,42.1 86.35,42.1 87.85,42.1 89.35,42.1 90.85,42.1 93.85,42.1 95.35,42.1 98.35,42.1 99.85,42.1 101.35,42.1 102.85,42.1 104.35,42.1 105.85,42.1 107.35,42.1 108.85,42.1 110.35,42.1 111.85,42.1 113.35,42.1 117.85,42.1 119.35,42.1 123.85,42.1 125.35,42.1 126.85,42.1 128.35,42.1 1.6,43.6 3.1,43.6 4.6,43.6 6.1,43.6 7.6,43.6 9.1,43.6 15.1,43.6 18.1,43.6 19.6,43.6 21.1,43.6 22.6,43.6 24.1,43.6 25.6,43.6 27.1,43.6 28.6,43.6 30.1,43.6 31.6,43.6 33.1,43.6 51.1,43.6 57.1,43.6 60.1,43.6 66.1,43.6 67.6,43.6 69.1,43.6 70.6,43.6 72.1,43.6 73.6,43.6 75.1,43.6 76.6,43.6 81.1,43.6 82.6,43.6 84.1,43.6 85.6,43.6 87.1,43.6 88.6,43.6 90.1,43.6 94.6,43.6 96.1,43.6 99.1,43.6 100.6,43.6 102.1,43.6 103.6,43.6 105.1,43.6 106.6,43.6 108.1,43.6 109.6,43.6 111.1,43.6 115.6,43.6 117.1,43.6 121.6,43.6 123.1,43.6 124.6,43.6 126.1,43.6 127.6,43.6 129.1,43.6 2.35,45.1 3.85,45.1 5.35,45.1 6.85,45.1 8.35,45.1 15.85,45.1 20.35,45.1 21.85,45.1 23.35,45.1 24.85,45.1 26.35,45.1 27.85,45.1 29.35,45.1 30.85,45.1 32.35,45.1 33.85,45.1 35.35,45.1 36.85,45.1 38.35,45.1 39.85,45.1 41.35,45.1 42.85,45.1 44.35,45.1 45.85,45.1 47.35,45.1 48.85,45.1 50.35,45.1 78.85,45.1 114.85,45.1 116.35,45.1 120.85,45.1 122.35,45.1 123.85,45.1 125.35,45.1 126.85,45.1 128.35,45.1 1.6,46.6 3.1,46.6 4.6,46.6 6.1,46.6 7.6,46.6 9.1,46.6 16.6,46.6 18.1,46.6 21.1,46.6 22.6,46.6 24.1,46.6 25.6,46.6 27.1,46.6 28.6,46.6 30.1,46.6 31.6,46.6 33.1,46.6 51.1,46.6 76.6,46.6 112.6,46.6 114.1,46.6 118.6,46.6 120.1,46.6 121.6,46.6 123.1,46.6 124.6,46.6 126.1,46.6 127.6,46.6 129.1,46.6 2.35,48.1 3.85,48.1 5.35,48.1 6.85,48.1 8.35,48.1 9.85,48.1 14.35,48.1 18.85,48.1 23.35,48.1 24.85,48.1 26.35,48.1 27.85,48.1 29.35,48.1 30.85,48.1 32.35,48.1 33.85,48.1 50.35,48.1 78.85,48.1 117.85,48.1 119.35,48.1 120.85,48.1 122.35,48.1 123.85,48.1 125.35,48.1 126.85,48.1 128.35,48.1 1.6,49.6 3.1,49.6 4.6,49.6 6.1,49.6 7.6,49.6 9.1,49.6 10.6,49.6 12.1,49.6 19.6,49.6 21.1,49.6 24.1,49.6 25.6,49.6 27.1,49.6 28.6,49.6 30.1,49.6 31.6,49.6 33.1,49.6 51.1,49.6 55.6,49.6 57.1,49.6 58.6,49.6 66.1,49.6 70.6,49.6 73.6,49.6 76.6,49.6 81.1,49.6 85.6,49.6 88.6,49.6 94.6,49.6 96.1,49.6 99.1,49.6 100.6,49.6 102.1,49.6 103.6,49.6 105.1,49.6 106.6,49.6 108.1,49.6 109.6,49.6 111.1,49.6 112.6,49.6 114.1,49.6 115.6,49.6 117.1,49.6 118.6,49.6 120.1,49.6 121.6,49.6 123.1,49.6 124.6,49.6 126.1,49.6 127.6,49.6 129.1,49.6 2.35,51.1 3.85,51.1 5.35,51.1 6.85,51.1 8.35,51.1 9.85,51.1 11.35,51.1 12.85,51.1 17.35,51.1 21.85,51.1 26.35,51.1 27.85,51.1 29.35,51.1 30.85,51.1 32.35,51.1 33.85,51.1 39.85,51.1 51.85,51.1 78.85,51.1 93.85,51.1 95.35,51.1 98.35,51.1 99.85,51.1 101.35,51.1 102.85,51.1 104.35,51.1 105.85,51.1 107.35,51.1 108.85,51.1 110.35,51.1 111.85,51.1 113.35,51.1 114.85,51.1 116.35,51.1 117.85,51.1 119.35,51.1 120.85,51.1 122.35,51.1 123.85,51.1 125.35,51.1 126.85,51.1 128.35,51.1 1.6,52.6 3.1,52.6 4.6,52.6 6.1,52.6 7.6,52.6 9.1,52.6 10.6,52.6 12.1,52.6 13.6,52.6 15.1,52.6 22.6,52.6 24.1,52.6 76.6,52.6 97.6,52.6 99.1,52.6 100.6,52.6 102.1,52.6 103.6,52.6 105.1,52.6 106.6,52.6 108.1,52.6 109.6,52.6 111.1,52.6 112.6,52.6 114.1,52.6 115.6,52.6 117.1,52.6 118.6,52.6 120.1,52.6 121.6,52.6 123.1,52.6 124.6,52.6 126.1,52.6 127.6,52.6 129.1,52.6 2.35,54.1 3.85,54.1 5.35,54.1 6.85,54.1 8.35,54.1 9.85,54.1 11.35,54.1 12.85,54.1 14.35,54.1 15.85,54.1 20.35,54.1 24.85,54.1 96.85,54.1 98.35,54.1 99.85,54.1 101.35,54.1 102.85,54.1 104.35,54.1 105.85,54.1 107.35,54.1 108.85,54.1 110.35,54.1 111.85,54.1 113.35,54.1 114.85,54.1 116.35,54.1 117.85,54.1 119.35,54.1 120.85,54.1 122.35,54.1 123.85,54.1 125.35,54.1 126.85,54.1 128.35,54.1 1.6,55.6 3.1,55.6 4.6,55.6 6.1,55.6 7.6,55.6 9.1,55.6 10.6,55.6 12.1,55.6 13.6,55.6 15.1,55.6 16.6,55.6 18.1,55.6 25.6,55.6 27.1,55.6 28.6,55.6 30.1,55.6 31.6,55.6 52.6,55.6 76.6,55.6 91.6,55.6 93.1,55.6 94.6,55.6 96.1,55.6 97.6,55.6 99.1,55.6 100.6,55.6 102.1,55.6 103.6,55.6 105.1,55.6 106.6,55.6 108.1,55.6 109.6,55.6 111.1,55.6 112.6,55.6 114.1,55.6 115.6,55.6 117.1,55.6 118.6,55.6 120.1,55.6 121.6,55.6 123.1,55.6 124.6,55.6 126.1,55.6 127.6,55.6 129.1,55.6 2.35,57.1 3.85,57.1 5.35,57.1 6.85,57.1 8.35,57.1 9.85,57.1 11.35,57.1 12.85,57.1 14.35,57.1 15.85,57.1 17.35,57.1 18.85,57.1 23.35,57.1 27.85,57.1 29.35,57.1 30.85,57.1 32.35,57.1 51.85,57.1 53.35,57.1 57.85,57.1 59.35,57.1 60.85,57.1 62.35,57.1 65.35,57.1 68.35,57.1 71.35,57.1 74.35,57.1 77.35,57.1 83.35,57.1 86.35,57.1 89.35,57.1 92.35,57.1 93.85,57.1 95.35,57.1 96.85,57.1 98.35,57.1 99.85,57.1 101.35,57.1 102.85,57.1 104.35,57.1 105.85,57.1 107.35,57.1 108.85,57.1 110.35,57.1 111.85,57.1 113.35,57.1 114.85,57.1 116.35,57.1 117.85,57.1 119.35,57.1 120.85,57.1 122.35,57.1 123.85,57.1 125.35,57.1 126.85,57.1 128.35,57.1 1.6,58.6 3.1,58.6 4.6,58.6 6.1,58.6 7.6,58.6 9.1,58.6 10.6,58.6 12.1,58.6 13.6,58.6 15.1,58.6 16.6,58.6 18.1,58.6 19.6,58.6 21.1,58.6 76.6,58.6 78.1,58.6 91.6,58.6 93.1,58.6 94.6,58.6 96.1,58.6 97.6,58.6 99.1,58.6 100.6,58.6 102.1,58.6 103.6,58.6 105.1,58.6 106.6,58.6 108.1,58.6 109.6,58.6 111.1,58.6 112.6,58.6 114.1,58.6 115.6,58.6 117.1,58.6 118.6,58.6 120.1,58.6 121.6,58.6 123.1,58.6 124.6,58.6 126.1,58.6 127.6,58.6 129.1,58.6 2.35,60.1 3.85,60.1 5.35,60.1 6.85,60.1 8.35,60.1 9.85,60.1 11.35,60.1 12.85,60.1 14.35,60.1 15.85,60.1 17.35,60.1 18.85,60.1 20.35,60.1 21.85,60.1 57.85,60.1 59.35,60.1 60.85,60.1 62.35,60.1 63.85,60.1 65.35,60.1 66.85,60.1 68.35,60.1 69.85,60.1 71.35,60.1 72.85,60.1 74.35,60.1 75.85,60.1 77.35,60.1 78.85,60.1 80.35,60.1 81.85,60.1 83.35,60.1 84.85,60.1 86.35,60.1 87.85,60.1 89.35,60.1 90.85,60.1 92.35,60.1 93.85,60.1 95.35,60.1 96.85,60.1 98.35,60.1 99.85,60.1 101.35,60.1 102.85,60.1 104.35,60.1 105.85,60.1 107.35,60.1 108.85,60.1 110.35,60.1 111.85,60.1 113.35,60.1 114.85,60.1 116.35,60.1 117.85,60.1 119.35,60.1 120.85,60.1 122.35,60.1 123.85,60.1 125.35,60.1 126.85,60.1 128.35,60.1 1.6,61.6 3.1,61.6 4.6,61.6 6.1,61.6 7.6,61.6 9.1,61.6 10.6,61.6 12.1,61.6 13.6,61.6 15.1,61.6 16.6,61.6 18.1,61.6 19.6,61.6 21.1,61.6 22.6,61.6 24.1,61.6 57.1,61.6 58.6,61.6 60.1,61.6 61.6,61.6 63.1,61.6 64.6,61.6 66.1,61.6 67.6,61.6 69.1,61.6 70.6,61.6 72.1,61.6 73.6,61.6 75.1,61.6 76.6,61.6 78.1,61.6 79.6,61.6 81.1,61.6 82.6,61.6 84.1,61.6 85.6,61.6 87.1,61.6 88.6,61.6 90.1,61.6 91.6,61.6 93.1,61.6 94.6,61.6 96.1,61.6 97.6,61.6 99.1,61.6 100.6,61.6 102.1,61.6 103.6,61.6 105.1,61.6 106.6,61.6 108.1,61.6 109.6,61.6 111.1,61.6 112.6,61.6 114.1,61.6 115.6,61.6 117.1,61.6 118.6,61.6 120.1,61.6 121.6,61.6 123.1,61.6 124.6,61.6 126.1,61.6 127.6,61.6 129.1,61.6 2.35,63.1 3.85,63.1 5.35,63.1 6.85,63.1 8.35,63.1 9.85,63.1 11.35,63.1 12.85,63.1 14.35,63.1 15.85,63.1 17.35,63.1 18.85,63.1 20.35,63.1 21.85,63.1 23.35,63.1 24.85,63.1 26.35,63.1 27.85,63.1 29.35,63.1 30.85,63.1 32.35,63.1 33.85,63.1 35.35,63.1 36.85,63.1 38.35,63.1 39.85,63.1 41.35,63.1 42.85,63.1 44.35,63.1 45.85,63.1 47.35,63.1 48.85,63.1 50.35,63.1 51.85,63.1 53.35,63.1 54.85,63.1 56.35,63.1 57.85,63.1 59.35,63.1 60.85,63.1 62.35,63.1 63.85,63.1 65.35,63.1 66.85,63.1 68.35,63.1 69.85,63.1 71.35,63.1 72.85,63.1 74.35,63.1 75.85,63.1 77.35,63.1 78.85,63.1 80.35,63.1 81.85,63.1 83.35,63.1 84.85,63.1 86.35,63.1 87.85,63.1 89.35,63.1 90.85,63.1 92.35,63.1 93.85,63.1 95.35,63.1 96.85,63.1 98.35,63.1 99.85,63.1 101.35,63.1 102.85,63.1 104.35,63.1 105.85,63.1 107.35,63.1 108.85,63.1 110.35,63.1 111.85,63.1 113.35,63.1 114.85,63.1 116.35,63.1 117.85,63.1 119.35,63.1 120.85,63.1 122.35,63.1 123.85,63.1 125.35,63.1 126.85,63.1 128.35,63.1 4,64.5 126,64.5 1.6,64.6 6.1,64.6 7.6,64.6 9.1,64.6 10.6,64.6 12.1,64.6 13.6,64.6 15.1,64.6 16.6,64.6 18.1,64.6 19.6,64.6 21.1,64.6 22.6,64.6 24.1,64.6 25.6,64.6 27.1,64.6 28.6,64.6 30.1,64.6 31.6,64.6 33.1,64.6 34.6,64.6 36.1,64.6 37.6,64.6 39.1,64.6 40.6,64.6 42.1,64.6 43.6,64.6 45.1,64.6 46.6,64.6 48.1,64.6 49.6,64.6 51.1,64.6 52.6,64.6 54.1,64.6 55.6,64.6 57.1,64.6 58.6,64.6 60.1,64.6 61.6,64.6 63.1,64.6 64.6,64.6 66.1,64.6 67.6,64.6 69.1,64.6 70.6,64.6 72.1,64.6 73.6,64.6 75.1,64.6 76.6,64.6 78.1,64.6 79.6,64.6 81.1,64.6 82.6,64.6 84.1,64.6 85.6,64.6 87.1,64.6 88.6,64.6 90.1,64.6 91.6,64.6 93.1,64.6 94.6,64.6 96.1,64.6 97.6,64.6 99.1,64.6 100.6,64.6 102.1,64.6 103.6,64.6 105.1,64.6 106.6,64.6 108.1,64.6 109.6,64.6 111.1,64.6 112.6,64.6 114.1,64.6 115.6,64.6 117.1,64.6 118.6,64.6 120.1,64.6 121.6,64.6 123.1,64.6 127.6,64.6 129.1,64.6 3,65 5,65 125,65 127,65 2.5,66 5.5,66 124.5,66 127.5,66 6.85,66.1 8.35,66.1 9.85,66.1 11.35,66.1 12.85,66.1 14.35,66.1 15.85,66.1 17.35,66.1 18.85,66.1 20.35,66.1 21.85,66.1 23.35,66.1 24.85,66.1 26.35,66.1 27.85,66.1 29.35,66.1 30.85,66.1 32.35,66.1 33.85,66.1 35.35,66.1 36.85,66.1 38.35,66.1 39.85,66.1 41.35,66.1 42.85,66.1 44.35,66.1 45.85,66.1 47.35,66.1 48.85,66.1 50.35,66.1 51.85,66.1 53.35,66.1 54.85,66.1 56.35,66.1 57.85,66.1 59.35,66.1 60.85,66.1 62.35,66.1 63.85,66.1 65.35,66.1 66.85,66.1 68.35,66.1 69.85,66.1 71.35,66.1 72.85,66.1 74.35,66.1 75.85,66.1 77.35,66.1 78.85,66.1 80.35,66.1 81.85,66.1 83.35,66.1 84.85,66.1 86.35,66.1 87.85,66.1 89.35,66.1 90.85,66.1 92.35,66.1 93.85,66.1 95.35,66.1 96.85,66.1 98.35,66.1 99.85,66.1 101.35,66.1 102.85,66.1 104.35,66.1 105.85,66.1 107.35,66.1 108.85,66.1 110.35,66.1 111.85,66.1 113.35,66.1 114.85,66.1 116.35,66.1 117.85,66.1 119.35,66.1 120.85,66.1 122.35,66.1 123.85,66.1 128.35,66.1 3,67 5,67 125,67 127,67 4,67.5 126,67.5 1.6,67.6 6.1,67.6 7.6,67.6 9.1,67.6 10.6,67.6 12.1,67.6 13.6,67.6 15.1,67.6 16.6,67.6 18.1,67.6 19.6,67.6 21.1,67.6 22.6,67.6 24.1,67.6 25.6,67.6 27.1,67.6 28.6,67.6 30.1,67.6 31.6,67.6 33.1,67.6 34.6,67.6 36.1,67.6 37.6,67.6 39.1,67.6 40.6,67.6 42.1,67.6 43.6,67.6 45.1,67.6 46.6,67.6 48.1,67.6 49.6,67.6 51.1,67.6 52.6,67.6 54.1,67.6 55.6,67.6 57.1,67.6 58.6,67.6 60.1,67.6 61.6,67.6 63.1,67.6 64.6,67.6 66.1,67.6 67.6,67.6 69.1,67.6 70.6,67.6 72.1,67.6 73.6,67.6 75.1,67.6 76.6,67.6 78.1,67.6 79.6,67.6 81.1,67.6 82.6,67.6 84.1,67.6 85.6,67.6 87.1,67.6 88.6,67.6 90.1,67.6 91.6,67.6 93.1,67.6 94.6,67.6 96.1,67.6 97.6,67.6 99.1,67.6 100.6,67.6 102.1,67.6 103.6,67.6 105.1,67.6 106.6,67.6 108.1,67.6 109.6,67.6 111.1,67.6 112.6,67.6 114.1,67.6 115.6,67.6 117.1,67.6 118.6,67.6 120.1,67.6 121.6,67.6 123.1,67.6 124.6,67.6 127.6,67.6 129.1,67.6 2.35,69.1 3.85,69.1 5.35,69.1 6.85,69.1 8.35,69.1 9.85,69.1 11.35,69.1 12.85,69.1 14.35,69.1 15.85,69.1 17.35,69.1 18.85,69.1 20.35,69.1 21.85,69.1 23.35,69.1 24.85,69.1 26.35,69.1 27.85,69.1 29.35,69.1 30.85,69.1 32.35,69.1 33.85,69.1 35.35,69.1 36.85,69.1 38.35,69.1 39.85,69.1 41.35,69.1 42.85,69.1 44.35,69.1 45.85,69.1 47.35,69.1 48.85,69.1 50.35,69.1 51.85,69.1 53.35,69.1 54.85,69.1 56.35,69.1 57.85,69.1 59.35,69.1 60.85,69.1 62.35,69.1 63.85,69.1 65.35,69.1 66.85,69.1 68.35,69.1 69.85,69.1 71.35,69.1 72.85,69.1 74.35,69.1 75.85,69.1 77.35,69.1 78.85,69.1 80.35,69.1 81.85,69.1 83.35,69.1 84.85,69.1 86.35,69.1 87.85,69.1 89.35,69.1 90.85,69.1 92.35,69.1 93.85,69.1 95.35,69.1 96.85,69.1 98.35,69.1 99.85,69.1 101.35,69.1 102.85,69.1 104.35,69.1 105.85,69.1 107.35,69.1 108.85,69.1 110.35,69.1 111.85,69.1 113.35,69.1 114.85,69.1 116.35,69.1 117.85,69.1 119.35,69.1 120.85,69.1 122.35,69.1 123.85,69.1 125.35,69.1 126.85,69.1 128.35,69.1
J1G: J1.GND_T J10.6 J10.12 | length 55.9
  Top Layer w0.349: v2(79.7,58.3) 83.15,58.3 J10.6 J10.12
  Bottom Layer w0.349: J1.GND_T 72.22,16.62 79.7,24.1 v2(79.7,58.3)
J1S: J1.TOP J9.6 J9.12 | length 36.4
  Top Layer w0.349: J1.TOP 76.3,21.22 76.3,33.9 80.75,38.35 J9.6 J9.12
J2G: J1.GND_B J10.5 J10.11 | length 56.4
  Top Layer w0.349: v2(78.2,55.8) 83.19,55.8 J10.5 J10.11
  Bottom Layer w0.349: J1.GND_B 67.14,16.04 78.2,27.1 v2(78.2,55.8)
J2S: J1.BOT J9.5 J9.11 | length 38
  Top Layer w0.349: J1.BOT 72.06,12.06 78.2,18.2 78.2,33.7 80.31,35.81 J9.5 J9.11
J3G: J2.GND_T J10.4 J10.10 | length 51.3
  Top Layer w0.349: J10.4 J10.10 88.87,53.2 v2(92.1,53.2)
  Bottom Layer w0.349: v2(92.1,53.2) 95,53.2 97.22,50.98 J2.GND_T
J3S: J2.TOP J9.4 J9.10 | length 29.1
  Top Layer w0.349: J9.4 J9.10 92.93,33.27 94.68,31.52 J2.TOP
J4G: J2.GND_B J10.3 J10.9 | length 45.3
  Top Layer w0.349: J10.3 J10.9 88.97,50.9 v2(92.1,50.9)
  Bottom Layer w0.349: v2(92.1,50.9) 92.12,50.88 92.12,14.62 J2.GND_B
J4S: J2.BOT J9.3 J9.9 | length 32.3
  Top Layer w0.349: J9.3 J9.9 91.07,30.73 92.9,28.9 92.9,20.4 90,17.5 90,13.5 91.44,12.06 J2.BOT
J5G: J3.GND_T J10.2 J10.8 | length 68.3
  Top Layer w0.349: J10.2 J10.8 88.81,48.2 v2(99,48.2)
  Bottom Layer w0.349: v2(99,48.2) 115,48.2 122.06,41.14 J3.GND_T
J5S: J3.TOP J9.2 J9.8 | length 79.6
  Top Layer w0.349: J9.8 J9.2 81.29,28.19 80,26.9 80,19.6 90.4,9.2 121.5,9.2 125.6,13.3 125.6,16 124.1,17.5 121.1,17.5 119.52,15.92 J3.TOP
J6G: J3.GND_B J10.1 J10.7 | length 61.6
  Top Layer w0.349: J10.1 J10.7 88.85,45.6 v2(98.9,45.6)
  Bottom Layer w0.349: v2(98.9,45.6) 111.6,45.6 116.98,40.22 J3.GND_B
J6S: J3.BOT J9.1 J9.7 | length 54.7
  Top Layer w0.349: J9.1 91.05,25.65 91.9,24.8 91.9,21.1 88.6,17.8 88.6,13 91,10.6 118.06,10.6 J3.BOT
P1: J4.1 J5.6 J5.12 J6.6 J6.12 J7.6 J11.6 | length 171.8
  Top Layer w0.349: J4.1 12.8,17.8 17,22 32,22 35.9,25.9 J7.6 35.9,32.3 34.5,33.7 34.5,39.4 35.9,40.8 J11.6 ; v2(54.2,58.2) 68.05,58.2 J5.6 J5.12 ; v2(64.9,38.3) 68.15,38.3 J6.6 J6.12
  Bottom Layer w0.349: J4.1 12.8,44.8 26.2,58.2 v2(54.2,58.2) ; v2(64.3,58.2) 64.3,38.9 v2(64.9,38.3)
P2: J4.4 J5.5 J5.11 J6.5 J6.11 J7.5 J11.5 | length 200.1
  Top Layer w0.349: J4.4 15.6,9 30,9 38.44,17.44 J7.5 38.44,32.26 37.2,33.5 37.2,39.5 38.44,40.74 J11.5 ; v2(54.2,55.6) 67.99,55.6 J5.5 J5.11 ; v2(64.9,35.8) 68.19,35.8 J6.5 J6.11
  Bottom Layer w0.349: J4.4 10.5,14.1 10.5,46.3 25.2,61 55.2,61 56.7,59.5 56.7,57.2 55.1,55.6 v2(54.2,55.6) ; v2(63.1,55.6) 63.1,36.4 63.7,35.8 v2(64.9,35.8)
P3: J4.5 J5.4 J5.10 J6.4 J6.10 J7.4 J11.4 | length 174.6
  Top Layer w0.349: J11.4 40.98,40.68 39.7,39.4 39.7,33.6 40.98,32.32 J7.4 41,30.58 v2(41,22.6) ; v2(54.2,53.2) 68.13,53.2 J5.4 J5.10 ; v2(64.9,33.2) 68.13,33.2 J6.4 J6.10
  Bottom Layer w0.349: v2(41,22.6) 40.8,22.6 31.8,13.6 J4.5 14.6,41.7 26.1,53.2 v2(54.2,53.2) ; v2(61.9,53.2) 61.9,34.3 63,33.2 v2(64.9,33.2)
P4: J5.3 J5.9 J6.3 J6.9 J7.3 J8.1 J11.3 | length 120.3
  Top Layer w0.349: J8.1 42.8,21 43.52,21.72 J7.3 43.52,32.28 42.5,33.3 42.5,34.579 42.456,34.622 42.456,37.778 42.5,37.821 42.5,39.3 43.52,40.32 J11.3 ; v2(54.3,50.8) v2(60.7,50.8) 68.13,50.8 J5.3 J5.9 ; v2(64.9,30.7) 68.17,30.7 J6.3 J6.9
  Bottom Layer w0.349: J8.1 52.303,24.903 52.303,49.103 53.686,50.486 53.711,50.486 54.025,50.8 v2(54.3,50.8) ; v2(60.7,50.8) 60.7,32.7 62.7,30.7 v2(64.9,30.7)
P5: J5.2 J5.8 J6.2 J6.8 J7.2 J8.4 J11.2 | length 135.8
  Top Layer w0.349: J11.2 46.06,40.36 44.8,39.1 44.8,33.6 46.06,32.34 J7.2 46.1,30.56 v2(46.1,24.9) ; v2(54.2,48.1) 68.11,48.1 J5.2 J5.8 ; v2(64.9,28.2) 68.19,28.2 J6.2 J6.8
  Bottom Layer w0.349: v2(46.1,24.9) 46.1,23.3 40.8,18 40.8,13.8 J8.4 44.8,9.8 48.5,9.8 55.9,17.2 55.9,46.4 v2(54.2,48.1) ; v2(59.5,48.1) 59.5,30.8 62,28.3 64.8,28.3 v2(64.9,28.2)
P6: J5.1 J5.7 J6.1 J6.7 J7.1 J8.5 J11.1 | length 124
  Top Layer w0.349: J8.5 44.6,16.4 48.6,20.4 J7.1 48.6,32.3 47.3,33.6 47.3,39.1 48.6,40.4 J11.1 ; v2(54.2,45.6) v2(58.3,45.6) 68.15,45.6 J5.1 J5.7 ; v2(64.9,25.6) 68.15,25.6 J6.1 J6.7
  Bottom Layer w0.349: J8.5 49.5,13.6 54.2,18.3 v2(54.2,45.6) ; v2(58.3,45.6) 58.3,28.5 61.2,25.6 v2(64.9,25.6)
pads on no net: J1.MH1 J1.MH2 J2.MH1 J2.MH2 J3.MH1 J3.MH2 J4.2 J4.3 J4.MH1 J4.MH2 J8.2 J8.3 J8.MH1 J8.MH2

## Polygon pours and split planes (outlines as drawn)
Earth on Layer 1 "NONET_L03_P-001" (solid, pour order 1): 0,0 130,0 130,70 0,70
Earth on Layer 2 "NONET_L03_P-001" (solid, pour order 2): 0,0 130,0 130,70 0,70
Earth on Top Layer "NONET_L03_P-001" (solid, pour order 0): 0,0 130,0 130,70 0,70
Earth on Bottom Layer "NONET_L03_P-001" (solid, pour order 3): 0,0 130,0 130,70 0,70

## Silkscreen, mask and mechanical layers (free items; w line width, h text height)
Top Overlay:
  circle w0.254: c22.5,55 r6.5
  circle w0.254: c7.5,55 r6.5
  circle w0.254: c120,50 r2.5
  circle w0.254: c120,57.5 r2.5
  circle w0.254: c112.5,50 r2.5
  circle w0.254: c112.5,57.5 r2.5
  circle w0.254: c105,50 r2.5
  circle w0.254: c105,57.5 r2.5
  lines w0.254: 30.5,41.5 32.5,41.5 ; 31,41 32,41 ; 31.5,43 31.5,42 30,42 33,42 ; 31.5,44.5 33.5,44.5 ; 31.5,45.5 32.5,45.5 ; 31.5,47 31.5,48 ; 32.5,44.5 32.5,43 30.5,43 30.5,44 30,44.25 31,44.75 30,45.25 31,45.75 30.5,46 30.5,47 32.5,47 32.5,45.5 ; 33.5,45.5 32.5,45.5 ; 68,61.5 68,63.5 74,63.5 74,61.5 ; 83.5,61.5 83.5,63.5 89,63.5 89,61.5 ; 68,61 67.5,61.5 68.5,61.5 68,61 ; 68,61 68,61 ; 74,61 74.5,61.5 74,61.5 ; 74,61 74,61 ; 74,61 73.5,61.5 74,61.5 ; 83.5,61 83,61.5 84,61.5 83.5,61 ; 83.5,61 83.5,61 ; 89,61.5 88.5,61.5 89,61 89.5,61.5 89,61.5 ; 1,45.5 1,47.5 29,47.5 cw(c29,47) 29,46.5 ccw(c29,46) 29,45.5 1,45.5 ; 33.5,34 33.5,39 51,39 51,34 33.5,34 ; 33.5,46 33.5,50.5 51,50.5 51,46 33.5,46 ; 100,45 cw(c100,45.5) 100,46 ccw(c100,46.5) 100,47 125,47 125,46 125,45 100,45 ; 102,47 108,47 108,60.5 102,60.5 102,47 ; 109.5,47 115.5,47 115.5,60.5 109.5,60.5 109.5,47 ; 117,47 123,47 123,60.5 117,60.5 117,47
  text "SAME" at 68.254,64.754 h1.52
  text "SAME" at 83.754,64.754 h1.52
  text "P1" at 3.254,57.754 h1.52
  text "X" at 9.754,57.754 h1.52
  text "P4" at 18.754,57.754 h1.52
  text "X" at 24.754,57.754 h1.52
  text "P1" at 62.254,57.754 h1.52
  text "J1G" at 91.754,57.754 h1.52
  text "J1" at 103.754,56.754 h1.52
  text "J3" at 111.254,56.754 h1.52
  text "J5" at 118.754,56.754 h1.52
  text "P2" at 62.254,55.254 h1.52
  text "J2G" at 91.754,55.254 h1.52
  text "P3" at 6.254,54.754 h1.52
  text "P6" at 21.754,54.754 h1.52
  text "P3" at 62.254,52.754 h1.52
  text "J3G" at 91.754,52.754 h1.52
  text "P2" at 3.254,51.254 h1.52
  text "X" at 9.754,51.254 h1.52
  text "P5" at 18.754,50.754 h1.52
  text "X" at 24.754,50.754 h1.52
  text "P4" at 62.254,50.254 h1.52
  text "J4G" at 91.754,50.254 h1.52
  text "J2" at 103.754,49.254 h1.52
  text "J4" at 111.254,49.254 h1.52
  text "J6" at 118.754,49.254 h1.52
  text "P5" at 62.254,47.754 h1.52
  text "J5G" at 91.754,47.754 h1.52
  text "P6" at 62.254,45.254 h1.52
  text "J6G" at 91.754,45.254 h1.52
  text "P1" at 62.254,37.754 h1.52
  text "J1S" at 91.754,37.754 h1.52
  text "P2" at 62.254,35.254 h1.52
  text "J2S" at 91.754,35.254 h1.52
  text "GND" at 28.5,34.5 h1.52
  text "P3" at 62.254,32.754 h1.52
  text "J3S" at 91.754,32.754 h1.52
  text "P4" at 62.254,30.254 h1.52
  text "J4S" at 91.754,30.254 h1.52
  text "P5" at 62.254,27.754 h1.52
  text "J5S" at 91.754,27.754 h1.52
  text "P6" at 62.254,25.254 h1.52
  text "J6S" at 91.754,25.254 h1.52
  text "P1" at 37,25 h1.52 r90
  text "P2" at 39.5,25 h1.52 r90
  text "P3" at 42,25 h1.52 r90
  text "P4" at 44.5,25 h1.52 r90
  text "P5" at 47,25 h1.52 r90
  text "P6" at 49.5,25 h1.52 r90
Mechanical 1:
  the board outline again, w0.254